# EAGLE board DualGainAmp (EAGLE 9.6.2)

No outline drawn. Coordinates in mm, seen from the top.
Copper layers (1*16): Top 0.035mm / dielectric 1.5mm / Bottom 0.035mm
Design rules "default": minimum track width 6mil, minimum drill 0.35mm, track to track 6mil, track to pad 6mil, pad to pad 6mil, via to via 6mil, smd to smd 6mil, copper to edge 40mil, drill to drill 6mil, minimum pad ring 10mil, minimum via ring 8mil, stop-mask expansion 4mil, vias tented up to drill 0mil, thermal gap 10mil

## Footprints (pad centres in the part's own frame; a part is rotated, then mirrored left to right if it is on the bottom)
C0402 = smd 0.7 x 0.9: 1 -0.65,0; 2 0.65,0
C2.5-2 = drill 0.813 pad 1.6 octagon: 1 -1.27,0; 2 1.27,0
SOIC127P600X175-8N = smd 1.528 x 0.65: 1 -2.711,1.905; 2 -2.711,0.635; 3 -2.711,-0.635; 4 -2.711,-1.905; 5 2.711,-1.905; 6 2.711,-0.635; 7 2.711,0.635; 8 2.711,1.905
1X02 = drill 1.016 long: 1 -1.27,0; 2 1.27,0
1X04 = drill 1.016 long: 1 -3.81,0; 2 -1.27,0; 3 1.27,0; 4 3.81,0
0204/5 = drill 0.813 octagon: 1 -2.54,0; 2 2.54,0

## Placement (x,y rotation side)
C1  [C0402]  5.08,-48.26 0 top
C2  [C0402]  5.08,-44.45 0 top
C3  [C0402]  5.08,-52.07 0 top
C4  [C0402]  5.08,-40.64 0 top
C5  [C2.5-2]  6.35,-7.62 0 top
IC1  OPA2202IDR  [SOIC127P600X175-8N]  8.89,12.7 0 top
JP1  [1X02]  6.35,-21.59 0 top
JP2  [1X04]  8.89,-27.94 0 top
R1  [0204/5]  6.35,1.27 0 top
R2  [0204/5]  6.35,-2.54 0 top
R3  1K  [0204/5]  6.35,-33.02 0 top
R4  [0204/5]  6.35,-12.7 0 top
R5  [0204/5]  6.35,-16.51 0 top
R6  1K  [0204/5]  6.35,-36.83 0 top

## Library data of the parts
C1-C4 = rcl; SPICEPREFIX: C
C5 = capacitor-wima
IC1 = OPA2202IDR; DESCRIPTION: Operational Amplifiers - Op Amps Low noise (0.2- uVPP, 9-nV/ Hz), heavy capacitive drive (25-nF), super beta, precision op amp, dual 8-SOIC -40 to 150; HEIGHT: 1.75mm; MANUFACTURER_NAME: Texas Instruments; MANUFACTURER_PART_NUMBER: OPA2202IDR; MOUSER_PART_NUMBER: 595-OPA2202IDR; MOUSER_PRICE-STOCK: https://www.mouser.co.uk/ProductDetail/Texas-Instruments/OPA2202IDR?qs=T94vaHKWudT4AJaF64Y1cw%3D%3D
JP1 JP2 = pinhead
R1-R6 = rcl; SPICEPREFIX: R

## Nets
+IN_A: C2.2 IC1.3 R3.2
+IN_B: C4.2 IC1.5 R6.2
-IN_A: C1.1 IC1.2 R1.2 R2.1
-IN_B: C3.1 IC1.6 R4.2 R5.1
GND: C2.1 C4.1 C5.1 IC1.4 JP2.2 R1.1 R4.1
INA: JP1.2 R3.1
INB: JP1.1 R6.1
N$3: C1.2 R2.2
N$4: C3.2 R5.2
OUTA: IC1.1 JP2.3
OUTB: IC1.7 JP2.4
VDD: C5.2 IC1.8 JP2.1

## Tracks (layer width: path | path; a pad name or v marks a point on that pad's centre or on a via)
+IN_A  (2 unrouted)
+IN_B  (2 unrouted)
-IN_A  (3 unrouted)
-IN_B  (3 unrouted)
GND  (6 unrouted)
INA  (1 unrouted)
INB  (1 unrouted)
N$3  (1 unrouted)
N$4  (1 unrouted)
OUTA  (1 unrouted)
OUTB  (1 unrouted)
VDD  (2 unrouted)